# Altium PCB RF Board - ECESHOP.PcbDoc
Units mil, origin at the board's own origin, x right, y up, seen from the top; angles counter-clockwise.
Board outline 2000 x 1000 mil, 2 copper layers (Top Layer, Bottom Layer); 17 components, 17 nets, 58 pads, 12 vias.
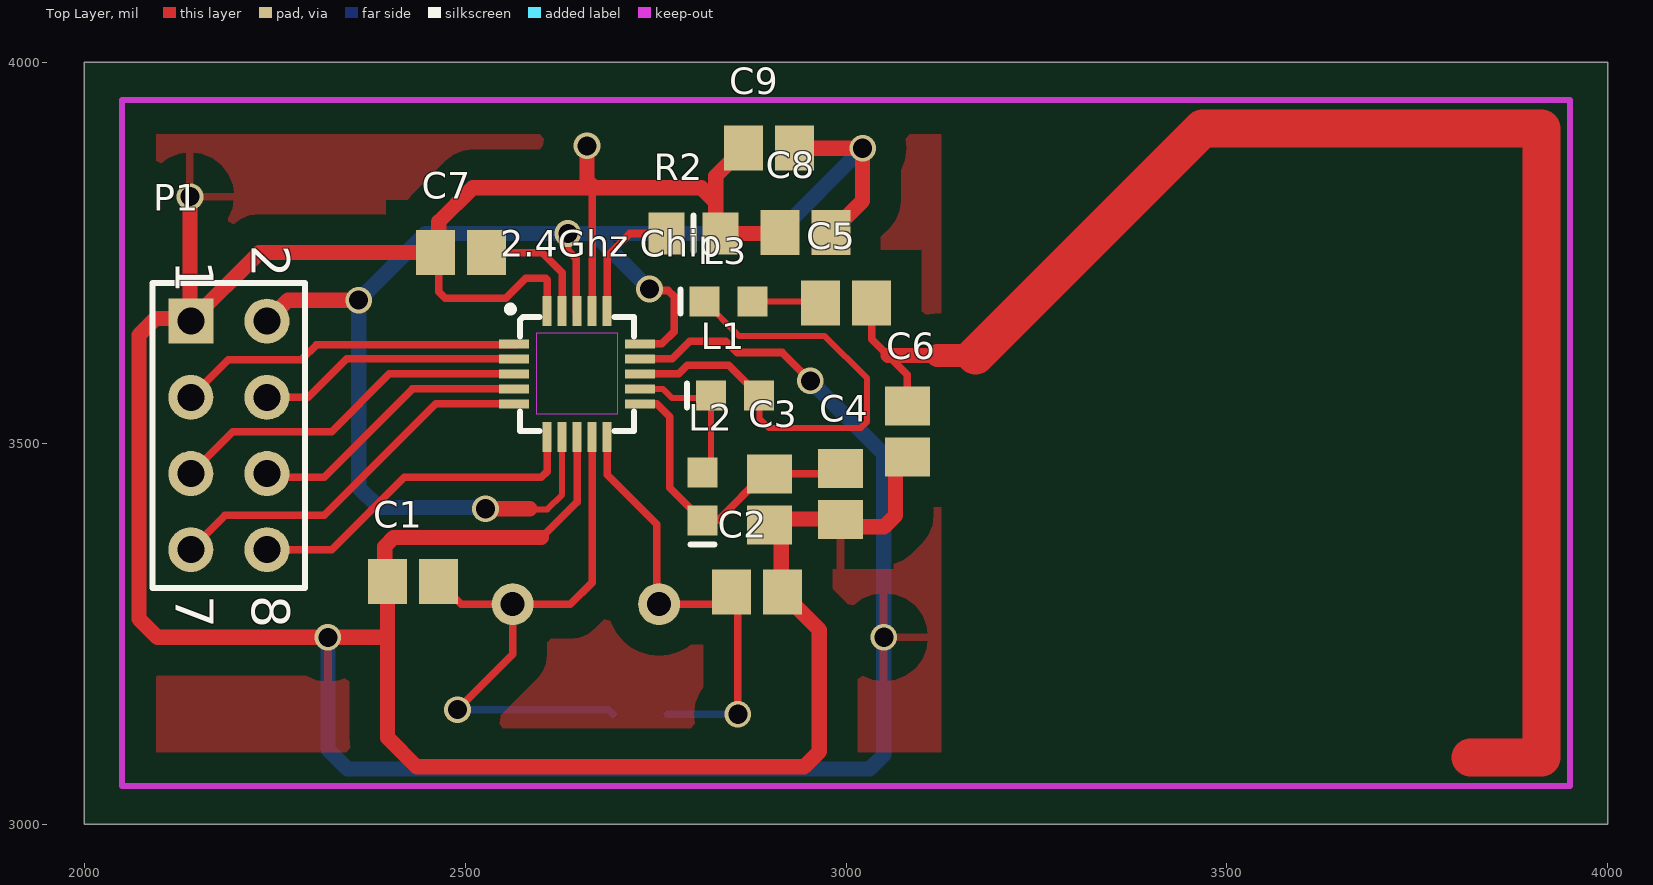
[diagram p0: Top Layer view]
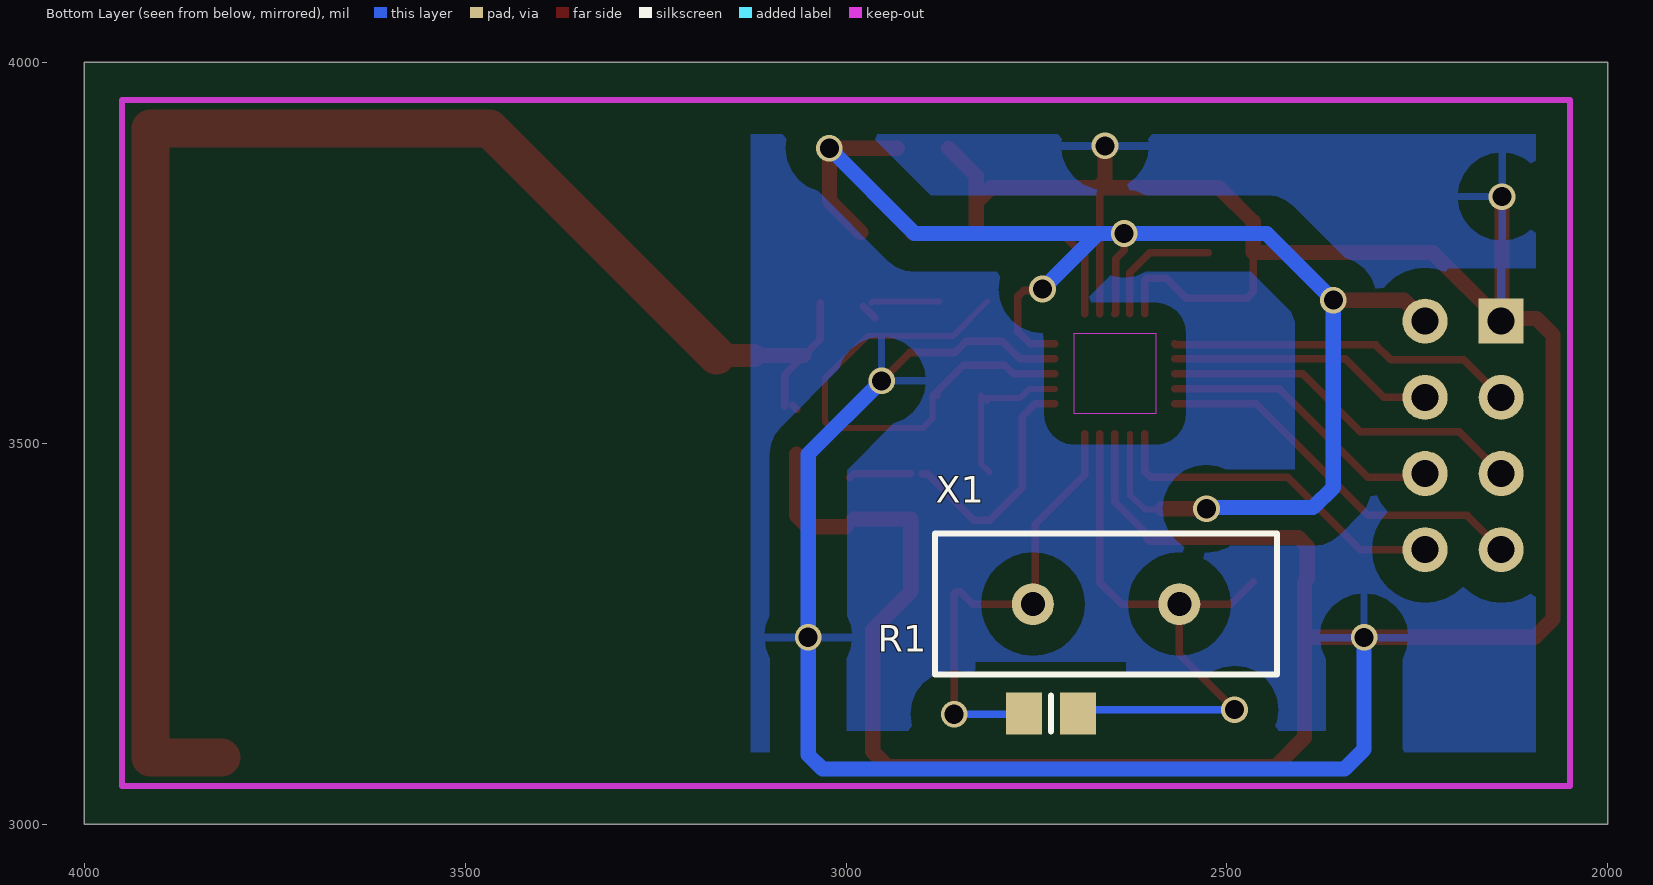
[diagram p1: Bottom Layer view, seen from below]

## Layer stack, top to bottom
Top Layer: signal copper 1.4
Dielectric: dielectric 12.6, FR-4, Dk 4.8
Bottom Layer: signal copper 1.4

## Board outline
2000,3000 4000,3000 4000,4000 2000,4000

## Design rules (kind name [scope] priority, off if disabled: settings)
Clearance "Polygon Clearance" [InPolygon] p1: gap=40
Clearance [All] p2: gap=8.1
HoleSize [All] p1: absolutevalues=TRUE maxlimit=100 minlimit=24 maxpercent=80.000 minpercent=20.000
PolygonConnect [All] p1: connectstyle=Relief reliefconductorwidth=10 reliefentries=4 polygonreliefangle="90 Angle"
RoutingVias [All] p1: holewidth=25 width=35 viastyle="Through Hole" minholewidth=25 minwidth=35 maxholewidth=25 maxwidth=35
SilkscreenOverComponentPads [All] p1: minsilkscreentomaskgap=10
SolderMaskExpansion [All] p1: expansion=4
Width [All] p1: maxlimit=50 minlimit=8 preferedwidth=8
26 further rules are at their usual default settings.

## Classes and differential pairs
component class "2.4Ghz Chip Board": P1
component class U_nRF24L01+: "2.4Ghz Chip" C1 C2 C3 C4 C5 C6 C7 C8 C9 L1 L2 L3 R1 R2 X1
net class SPI[3..0]: SPI0 SPI1 SPI2 SPI3

## Components (designator, comment, footprint, x,y, rotation, side; value= is the part's Value field where it differs from the comment)
"2.4Ghz Chip" "nRF24L01+" nRF24L01+ 2576.16,3630.12 r0 top
C1 "Cap Semi" CAPC2012N 2431.81,3318.02 r0 top
C2 "Cap Semi" CAPC2012N 2883.35,3304.68 r180 top
C3 "Cap Semi" CAPC2012N 2899.64,3425.9 r90 top
C4 "Cap Semi" CAPC2012N 2992.87,3433.15 r90 top
C5 "Cap Semi" CAPC2012N 3000.12,3683.85 r180 top
C6 "Cap Semi" CAPC2012N 3080.62,3514.92 r90 top
C7 "Cap Semi" CAPC2012N 2495,3750 r0 top
C8 "Cap Semi" CAPC2012N 2946.88,3776.47 r0 top
C9 "Cap Semi" CAPC2012N 2899.02,3887.01 r0 top
L1 "Inductor" INDC1608N 2854.06,3562.65 r0 top
L2 "Inductor" INDC1608N 2811.58,3430.04 r90 top
L3 "Inductor" INDC1608N 2845.77,3685.93 r0 top
P1 "Header 4X2" HDR2X4 2140,3660 r270 top
R1 "Res2" RESC2012N 2731.25,3145.08 r0 bottom
R2 "Res3" RESC2012N 2799.53,3775 r0 top
X1 "16Mhz" "HC-49U - Through Hole" 2658.63,3288.52 r0 bottom

## Footprints (in the part's own frame and the unit in brackets; to place one, negate y for a bottom-side part, rotate by r counter-clockwise, add the part's x,y. Pads: shape width x height; smd on the part's side, far side on the other; paste and mask are expansions set on the pad)
CAPC2012N [mm] "Chip Capacitor, Body 2.0x1.3mm, IPC Medium Density"
  rect 1.3x1.5 smd: 1(-0.85,0) 2(0.85,0)
  body extent -1.1,-0.72 1.1,0.72, height 1.1
"HC-49U - Through Hole" [mm] "Quartz Crystal, Thru-Hole; 2 Leads; Body 11.35 x 4.65 x 13.46 mm (LxWxH max)"
  round 1.4 hole 0.8: 1(-2.44,0) 2(2.44,0)
  silkscreen extent -5.7,-2.35 5.7,2.35
HDR2X4 [mm] "Connector; Header; 4x2 Position"
  rect 1.5x1.5 hole 0.9: 1(0,0)
  round 1.5 hole 0.9: 2(0,2.54) 3(2.54,0) 4(2.54,2.54) 5(5.08,0) 6(5.08,2.54) 7(7.62,0) 8(7.62,2.54)
  silkscreen extent -1.27,-1.27 8.89,3.81
INDC1608N [mm] "Chip Inductor, Body 1.6x0.8mm, IPC Medium Density"
  rect 1x1 smd: 1(-0.8,0) 2(0.8,0)
  silkscreen extent -1.6,-0.4 -1.6,0.4, body extent -0.87,-0.48 0.87,0.48, height 0.71
nRF24L01+ [mm]
  rect 1x0.29 smd: 1(-0.3,0) 2(-0.3,-0.5) 3(-0.3,-1) 4(-0.3,-1.5) 5(-0.3,-2) 11(3.9,-2) 12(3.9,-1.5) 13(3.9,-1) 14(3.9,-0.5) 15(3.9,0)
  rect 0.29x1 smd: 6(0.8,-3.1) 7(1.3,-3.1) 8(1.8,-3.1) 9(2.3,-3.1) 10(2.8,-3.1) 16(2.8,1.1) 17(2.3,1.1) 18(1.8,1.1) 19(1.3,1.1) 20(0.8,1.1)
  Keep-Out Layer region: 0.447,-2.334 3.152,-2.334 3.152,0.357 0.447,0.357
  silkscreen extent -0.49,-2.9 3.7,1.22
RESC2012N [mm] "Chip Resistor, Body 2.0x1.3mm, IPC Medium Density"
  rect 1.2x1.4 smd: 1(-0.9,0) 2(0.9,0)
  silkscreen extent 0,-0.6 0,0.6, body extent -1.07,-0.7 1.07,0.7, height 0.65

## Part data
C1 C2 C3 C4 C5 C6 C7 C8 C9: "Capacitor (Semiconductor SIM Model)"
P1: "Header, 4-Pin, Dual row"
R1 R2: "Resistor"
X1: library part XTAL, "Crystal Oscillator"

## Via types
v1: diameter 35, hole 25, Top Layer to Bottom Layer, 12 vias

## Nets (pads, with @x,y where several pads share a name; then routed paths per layer and width w, separated by ;. In a path a pad name is that pad's centre, name@x,y a point inside that pad or via, vN(x,y) a via of type N, cw(c..) or ccw(c..) an arc to the next point about the centre after c; other vN are vias at no path point)
3.3VCC: "2.4Ghz Chip.7" "2.4Ghz Chip.15" "2.4Ghz Chip.18" C8.2 C9.2 P1.2 | length 2064
  Top Layer w8: 2584.99,3413.78 2585.76,3413.01 2607.93,3413.01 2627.34,3432.42 2627.34,3512.01 ; v1(2742.08,3702.14) v1@2744.04,3700.18
  Top Layer w10: v1(2635,3775) 2635,3752.85 2646.15,3741.7 2646.15,3670.37 2647.03,3669.49 ; 2725.77,3630.12 2758.37,3630.12 2774.65,3646.4 2774.65,3692.33 2766.8,3700.18 v1@2744.04,3700.18 ; v1@3021.77,3887.01 v1(3021.88,3886.9)
  Top Layer w20: P1.2 2267.53,3687.53 v1(2360.4,3687.53) ; v1(2526.89,3413.78) 2584.99,3413.78 ; C9.2 3021.77,3887.01 3021.77,3817.9 C8.2
  Bottom Layer w8: v1(2360.4,3687.53) v1@2361.89,3689.02
  Bottom Layer w20: P1.2 P1.2@2245,3665 ; v1(2360.4,3687.53) 2360.4,3441.88 2386.97,3415.31 2525.36,3415.31 v1(2526.89,3413.78) ; v1@2361.89,3689.02 2447.87,3775 v1(2635,3775) 2669.22,3775 ; v1(2742.08,3702.14) 2669.22,3775 ; v1(3021.88,3886.9) 2909.98,3775 2669.22,3775
CE: "2.4Ghz Chip.1" P1.3 | length 457.3
  Top Layer w10: P1.3 2189.34,3609.34 2285.16,3609.34 2305.06,3629.24 2567.41,3629.24 2568.29,3630.12
GND: "2.4Ghz Chip.8" "2.4Ghz Chip.14" "2.4Ghz Chip.17" "2.4Ghz Chip.20" C1.1 C2.1 C3.1 C4.1 C6.1 C7.1 C8.1 C9.1 P1.1 R2.2 | length 5919.2
  Top Layer w10: C7.1@2465.47,3750 2465.47,3698.34 2473.81,3690 2553.66,3690 2579.97,3716.32 2605.88,3716.32 2607.66,3714.53 2607.66,3669.49 ; 2600.29,3375.91 2647.03,3422.65 2647.03,3512.01 ; 2660,3845 2666.71,3838.29 2666.71,3835 2666.71,3669.49 ; 2725.77,3610.43 2771.89,3610.43 2795.2,3633.74 2842.28,3633.74 2857.25,3618.77 2916.1,3618.77 v1(2953.17,3581.7) ; C8.1@2911.95,3775 C8.1 ; C2.1@2914.53,3305 C2.1@2915,3305.47 ; C4.1@2990,3400.47 C4.1@3000.47,3390
  Top Layer w20: v1(2139,3823.46) P1.1@2139,3661 ; 2600.29,3375.91 2406.14,3375.91 2394.6,3364.37 2394.6,3321.77 C1.1 2398.35,3244.28 ; 2660,3845 v1(2660,3890) ; 2666.71,3838.29 2670,3835 ; C9.1 2829.06,3850.51 2829.06,3815.94 ; C8.1@2911.95,3775 2829.06,3775 2829.06,3815.94 ; C2.1@2914.53,3305 2965,3254.53 2965,3095 2945,3075 2436.63,3075 2398.35,3113.28 2398.35,3244.28 ; C2.1@2915,3305.47 2915,3400.47 C4.1@2990,3400.47 ; C4.1@3000.47,3390 3050,3390 3065,3405 C6.1@3065,3485.47 ; P1.1@2139,3661 2131.71,3653.71 P1.1 ; P1.1@2139,3661 2136.69,3663.31 2093.71,3663.31 2072.1,3641.7 2072.1,3269.2 2096.3,3245 v1(2320,3245) 2397.63,3245 2398.35,3244.28 ; P1.1@2139,3661 P1.1 ; P1.1 2230,3750 2465.47,3750 2465.47,3790.47 2510,3835 2666.71,3835 2670,3835 ; 2670,3835 2810,3835 2829.06,3815.94
  Bottom Layer w20: v1(2320,3245) 2320,3097.79 2345.69,3072.1 3030.85,3072.1 3049.61,3090.86 v1(3049.61,3245.14) 3049.61,3485.26 v1(2953.17,3581.7)
IRQ: "2.4Ghz Chip.6" P1.8 | length 459.5
  Top Layer w10: P1.8 2325,3360 2420,3455 2600,3455 2607.66,3462.66 2607.66,3512.01
"Net2.4Ghz Chip_9": "2.4Ghz Chip.9" C1.2 R1.1 X1.1 | length 796.2
  Top Layer w10: C1.2 2494.77,3288.52 X1.1 ; v1(2490,3149.99) 2562.57,3222.57 X1.1 ; 2666.71,3512.01 2666.71,3508.07 2666.71,3316.97 2638.26,3288.52 X1.1
  Bottom Layer w10: v1(2490,3149.99) 2620,3150 2688.92,3150 R1.1@2694.71,3144.21
"Net2.4Ghz Chip_10": "2.4Ghz Chip.10" C2.2 R1.2 X1.2 | length 608.2
  Top Layer w10: 2686.4,3512.01 2686.4,3508.07 2686.4,3458.6 2751.59,3393.41 2751.59,3291.63 X1.2 2833.73,3288.52 C2.2 ; C2.2@2855.47,3305 2857.99,3302.48 v1(2857.99,3144.02)
  Bottom Layer w10: R1.2@2765.57,3144.21 2857.8,3144.21 v1(2857.99,3144.02)
"Net2.4Ghz Chip_11": "2.4Ghz Chip.11" C3.2 C4.2 L2.1 | length 399
  Top Layer w10: 2725.77,3551.38 2751.83,3551.38 2768.58,3534.63 2768.58,3441.54 L2.1 2832.1,3398.54 2892.92,3459.36 C3.2 ; C3.2@2915,3459.53 2990,3459.53 C4.2@2995,3454.53
"Net2.4Ghz Chip_12": "2.4Ghz Chip.12" L1.1 L2.2 | length 214.1
  Top Layer w8: 2725.77,3571.07 2759.6,3571.07 2771.76,3558.9 L1.1@2818.81,3558.9 ; L2.2 2822.56,3472.52 L1.1 L1.1@2818.81,3558.9 ; L1.1@2815.23,3555.32 L1.1@2818.81,3558.9
"Net2.4Ghz Chip_13": "2.4Ghz Chip.13" L1.2 L3.1 | length 684.8
  Top Layer w8: L3.1 2859.47,3640.74 2971.66,3640.74 3027.61,3584.79 3027.61,3528.08 3019.35,3519.82 2898.77,3519.82 2886.66,3531.93 2886.66,3561.55 L1.2 2880.46,3562.65 L1.2@2879.05,3562.65
  Top Layer w10: 2725.77,3590.75 2780.68,3590.75 2791.88,3601.95 2846.26,3601.95 L1.2 L1.2@2880.46,3562.65
"Net2.4Ghz Chip_16": "2.4Ghz Chip.16" R2.1 | length 171.6
  Top Layer w10: 2686.4,3669.49 2686.4,3745.06 2716.34,3775 R2.1@2770,3775
"Net2.4Ghz Chip_19": "2.4Ghz Chip.19" C7.2 | length 168
  Top Layer w10: C7.2@2524.53,3750 2601.1,3750 2627.34,3723.76 2627.34,3669.49
NetC5_1: C5.1 C6.2 | length 2062
  Top Layer w10: C5.1 3033.58,3636.42 3055,3615 3080.62,3589.38 C6.2 ; C6.2@3065,3544.53 C6.2@3070,3549.53
  Top Layer w20: 3055,3615 3120,3615
  Top Layer w30: 3120,3615 3170,3615
  Top Layer w50: 3170,3615 3467.9,3912.9 3912.9,3912.9 3912.9,3087.1 3820,3087.1
NetC5_2: C5.2 L3.2 | length 111.2
  Top Layer w8: L3.2 2964.58,3685.93 C5.2
  Top Layer w10: C5.2@2962.42,3664.8 C5.2@2977.23,3679.61
SPI0: "2.4Ghz Chip.2" P1.4 | length 349.2
  Top Layer w10: P1.4 2294.34,3560 2344.77,3610.43 2568.29,3610.43
SPI1: "2.4Ghz Chip.3" P1.5 | length 482.4
  Top Layer w10: P1.5 2195,3515 2325,3515 2400.75,3590.75 2568.29,3590.75
SPI2: "2.4Ghz Chip.4" P1.6 | length 378.4
  Top Layer w10: P1.6 2245,3455 2315,3455 2431.07,3571.07 2568.29,3571.07
SPI3: "2.4Ghz Chip.5" P1.7 | length 507.6
  Top Layer w10: P1.7 2185,3405 2315,3405 2461.38,3551.38 2568.29,3551.38

## Polygon pours and split planes (outlines as drawn)
GND on Bottom Layer "Bottom Layer-No Net" (solid, pour order 2): 2025,3980 2030,3975 3125,3975 3125,3025 2025,3025
GND on Top Layer "Top Layer-GND" (solid, pour order 4): 2025,3975 3125,3975 3125,3025 2025,3025

## Keep-outs
Keep-Out Layer:
  lines w8: 2050,3050 3950,3050 3950,3950 2050,3950 2050,3050

## Silkscreen, mask and mechanical layers (free items; w line width, h text height)
Drill Drawing:
  text ".LEGEND" at 4200,3200 h60
  text "Drill Drawing." at 4200,3100 h60

## Dimensions
2050,3050 to 3950,3050 on Mechanical 1
2050,3050 to 2050,3950 on Mechanical 1

## Text inside footprints (layer, text, board x,y; h text height)
P1: Top Overlay "8" at 2220,3300 h50 r270; Top Overlay "7" at 2120,3300 h50 r270; Top Overlay "1" at 2120,3740 h50 r270; Top Overlay "2" at 2220,3760 h50 r270